# EAGLE board shift-register (EAGLE 7.6.0)
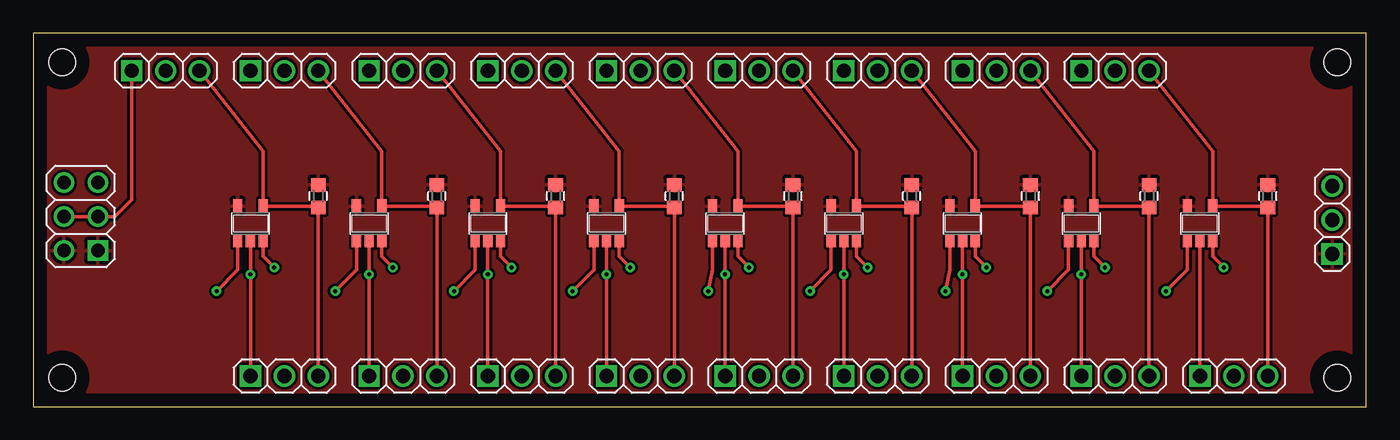
[diagram p0: board, top side]
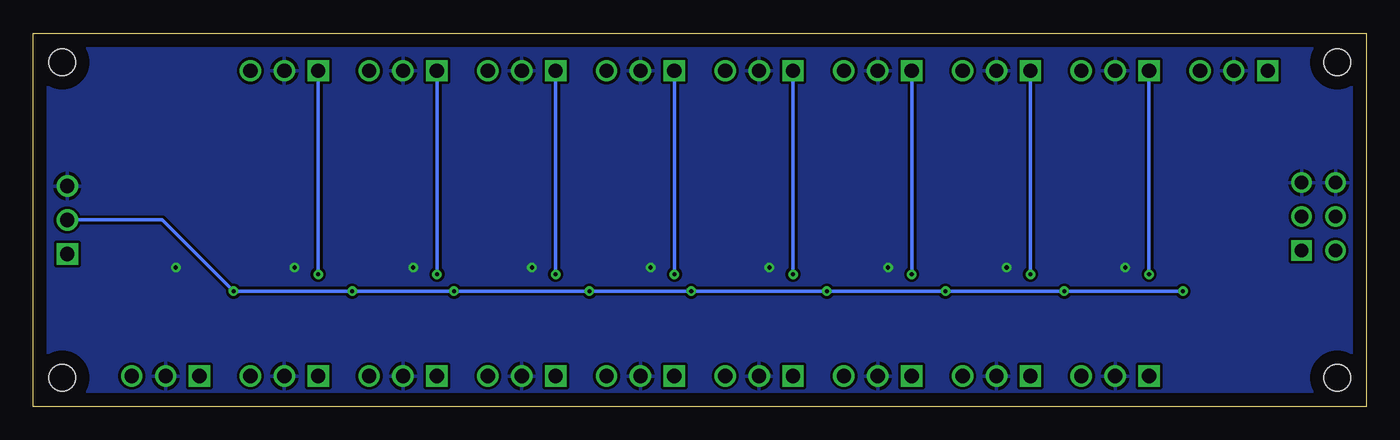
[diagram p1: board, bottom side, seen from below]

Size 99.82 x 27.94 mm. Coordinates in mm from the lower left corner, seen from the top.
Outline: 0,0 99.82,0 99.82,27.94 0,27.94 0,0
Copper layers (1*16): Top 0.035mm / dielectric 1.5mm / Bottom 0.035mm
Design rules "default": minimum track width 10mil, minimum drill 24mil, track to track 8mil, track to pad 8mil, pad to pad 8mil, via to via 8mil, smd to smd 8mil, copper to edge 40mil, drill to drill 8mil, minimum pad ring 10mil, minimum via ring 8mil, stop-mask expansion 4mil, vias tented up to drill 0mil, thermal gap 10mil
Holes 2.01 mm at 2.16,2.16 97.66,2.16 2.16,25.78 97.66,25.78
tRestrict: area 0.2,0.2 to 4.2,4.2; area 95.7,0.2 to 99.7,4.2; area 0.2,23.8 to 4.2,27.8; area 95.7,23.8 to 99.7,27.8
bRestrict: area 0.2,0.2 to 4.2,4.2; area 95.7,0.2 to 99.7,4.2; area 0.2,23.8 to 4.2,27.8; area 95.7,23.8 to 99.7,27.8

## Footprints (pad centres in the part's own frame; a part is rotated, then mirrored left to right if it is on the bottom)
SOT23-5 = smd 0.69 x 0.99: 1 -0.95,-1.29; 2 0,-1.29; 3 0.95,-1.29; 4 0.95,1.3; 5 -0.95,1.3
2X03 = drill 1.016 square: 1 -2.54,-1.27 | drill 1.016: 2 -2.54,1.27; 3 0,-1.27; 4 0,1.27; 5 2.54,-1.27; 6 2.54,1.27
1X03 = drill 1.067 square: 1 -2.54,0 | drill 1.067: 2 0,0; 3 2.54,0
R0603 = smd 1 x 1.1: 1 -0.85,0; 2 0.85,0

## Placement (x,y rotation side)
IC1  74LVC1G125DBV  [SOT23-5]  16.26,13.72 0 top
IC2  74LVC1G125DBV  [SOT23-5]  25.15,13.72 0 top
IC3  74LVC1G125DBV  [SOT23-5]  34.04,13.72 0 top
IC4  74LVC1G125DBV  [SOT23-5]  42.93,13.72 0 top
IC5  74LVC1G125DBV  [SOT23-5]  51.82,13.72 0 top
IC6  74LVC1G125DBV  [SOT23-5]  60.71,13.72 0 top
IC7  74LVC1G125DBV  [SOT23-5]  69.6,13.72 0 top
IC8  74LVC1G125DBV  [SOT23-5]  78.49,13.72 0 top
IC9  74LVC1G125DBV  [SOT23-5]  87.38,13.72 0 top
JP1  [2X03]  3.56,14.22 90 top
JP2  [1X03]  9.91,25.15 0 top
JP3  [1X03]  18.8,2.29 0 top
JP4  [1X03]  18.8,25.15 0 top
JP5  [1X03]  27.69,2.29 0 top
JP6  [1X03]  27.69,25.15 0 top
JP7  [1X03]  36.58,2.29 0 top
JP8  [1X03]  36.58,25.15 0 top
JP9  [1X03]  45.47,2.29 0 top
JP10  [1X03]  45.47,25.15 0 top
JP11  [1X03]  54.36,2.29 0 top
JP12  [1X03]  54.36,25.15 0 top
JP13  [1X03]  63.25,2.29 0 top
JP14  [1X03]  63.25,25.15 0 top
JP15  [1X03]  72.14,2.29 0 top
JP16  [1X03]  72.14,25.15 0 top
JP17  [1X03]  81.03,2.29 0 top
JP18  [1X03]  81.03,25.15 0 top
JP19  [1X03]  89.92,2.29 0 top
JP20  [1X03]  97.28,13.97 90 top
R1  [R0603]  21.34,15.75 90 top
R2  [R0603]  30.23,15.75 90 top
R3  [R0603]  39.12,15.75 90 top
R4  [R0603]  48.01,15.75 90 top
R5  [R0603]  56.9,15.75 90 top
R6  [R0603]  65.79,15.75 90 top
R7  [R0603]  74.68,15.75 90 top
R8  [R0603]  83.57,15.75 90 top
R9  [R0603]  92.46,15.75 90 top

## Library data of the parts
IC1-IC9 = 74xx-little-us
JP1-JP20 = pinhead
R1-R9 = resistor

## Nets
ENABLE: IC1.1 IC2.1 IC3.1 IC4.1 IC5.1 IC6.1 IC7.1 IC8.1 IC9.1 JP20.2
GND: IC1.3 IC2.3 IC3.3 IC4.3 IC5.3 IC6.3 IC7.3 IC8.3 IC9.3 JP1.5 JP1.6 JP2.2 JP3.2 JP4.2 JP5.2 JP6.2 JP7.2 JP8.2 JP9.2 JP10.2 JP11.2 JP12.2 JP13.2 JP14.2 JP15.2 JP16.2 JP17.2 JP18.2 JP19.2 JP20.3
IN0: JP1.3 JP1.4 JP2.1
IN1: IC1.2 JP3.1 JP4.1
IN2: IC2.2 JP5.1 JP6.1
IN3: IC3.2 JP7.1 JP8.1
IN4: IC4.2 JP9.1 JP10.1
IN5: IC5.2 JP11.1 JP12.1
IN6: IC6.2 JP13.1 JP14.1
IN7: IC7.2 JP15.1 JP16.1
IN8: IC8.2 JP17.1 JP18.1
IN9: IC9.2 JP19.1
OUT1: IC1.4 JP2.3 JP3.3 R1.1
OUT2: IC2.4 JP4.3 JP5.3 R2.1
OUT3: IC3.4 JP6.3 JP7.3 R3.1
OUT4: IC4.4 JP8.3 JP9.3 R4.1
OUT5: IC5.4 JP10.3 JP11.3 R5.1
OUT6: IC6.4 JP12.3 JP13.3 R6.1
OUT7: IC7.4 JP14.3 JP15.3 R7.1
OUT8: IC8.4 JP16.3 JP17.3 R8.1
OUT9: IC9.4 JP18.3 JP19.3 R9.1
VCC: IC1.5 IC2.5 IC3.5 IC4.5 IC5.5 IC6.5 IC7.5 IC8.5 IC9.5 JP1.1 JP1.2 JP20.1 R1.2 R2.2 R3.2 R4.2 R5.2 R6.2 R7.2 R8.2 R9.2

## Tracks (layer width: path | path; a pad name or v marks a point on that pad's centre or on a via)
ENABLE  (via drill 0.3)
  Top 0.254: IC1.1 15.31,10.23 v13.72,8.64 | IC2.1 24.2,10.23 v22.61,8.64 | IC3.1 33.09,10.23 v31.5,8.64 | IC4.1 41.98,10.23 v40.39,8.64 | IC5.1 50.87,10.23 v50.55,8.64 | IC6.1 59.76,10.23 v58.17,8.64 | IC7.1 68.65,10.23 v68.33,8.64 | IC8.1 77.54,10.23 v75.95,8.64 | IC9.1 86.43,10.23 v84.84,8.64
  Bottom 0.254: v13.72,8.64 v22.61,8.64 v31.5,8.64 v40.39,8.64 v50.55,8.64 v58.17,8.64 v68.33,8.64 v75.95,8.64 v84.84,8.64 90.17,13.97 JP20.2
GND  (via drill 0.3)
  Top 0.254: IC1.3 17.21,11.24 v18.03,10.41 | IC2.3 26.1,11.24 v26.92,10.41 | IC3.3 34.99,11.24 v35.81,10.41 | IC4.3 43.88,11.24 v44.7,10.41 | IC5.3 52.77,11.24 v53.59,10.41 | IC6.3 61.66,11.24 v62.48,10.41 | IC7.3 70.55,11.24 v71.37,10.41 | IC8.3 79.44,11.24 v80.26,10.41 | IC9.3 88.33,11.24 v89.15,10.41
  pour Bottom: 0,0 99.82,0 99.82,27.94 0,27.94
IN0
  Top 0.254: JP1.4 JP1.3 6.1,14.22 7.37,15.49 JP2.1
IN1  (via drill 0.3)
  Top 0.254: JP3.1 v16.26,9.91 IC1.2
  Bottom 0.254: JP4.1 v16.26,9.91
IN2  (via drill 0.3)
  Top 0.254: JP5.1 v25.15,9.91 IC2.2
  Bottom 0.254: JP6.1 v25.15,9.91
IN3  (via drill 0.3)
  Top 0.254: JP7.1 v34.04,9.91 IC3.2
  Bottom 0.254: JP8.1 v34.04,9.91
IN4  (via drill 0.3)
  Top 0.254: JP9.1 v42.93,9.91 IC4.2
  Bottom 0.254: JP10.1 v42.93,9.91
IN5  (via drill 0.3)
  Top 0.254: JP11.1 v51.82,9.91 IC5.2
  Bottom 0.254: JP12.1 v51.82,9.91
IN6  (via drill 0.3)
  Top 0.254: JP13.1 v60.71,9.91 IC6.2
  Bottom 0.254: JP14.1 v60.71,9.91
IN7  (via drill 0.3)
  Top 0.254: JP15.1 v69.6,9.91 IC7.2
  Bottom 0.254: JP16.1 v69.6,9.91
IN8  (via drill 0.3)
  Top 0.254: JP17.1 v78.49,9.91 IC8.2
  Bottom 0.254: JP18.1 v78.49,9.91
IN9
  Top 0.254: IC9.2 JP19.1
OUT1
  Top 0.254: JP2.3 17.21,19.12 IC1.4 21.22,15.02 R1.1 JP3.3
OUT2
  Top 0.254: JP4.3 26.1,19.12 IC2.4 30.11,15.02 R2.1 JP5.3
OUT3
  Top 0.254: JP6.3 34.99,19.12 IC3.4 39,15.02 R3.1 JP7.3
OUT4
  Top 0.254: JP8.3 43.88,19.12 IC4.4 47.89,15.02 R4.1 JP9.3
OUT5
  Top 0.254: IC5.4 52.77,19.12 JP10.3 | IC5.4 | IC5.4 56.78,15.02 R5.1 JP11.3
OUT6
  Top 0.254: JP13.3 R6.1 65.67,15.02 IC6.4 61.66,19.12 JP12.3
OUT7
  Top 0.254: JP14.3 70.55,19.12 IC7.4 74.56,15.02 R7.1 JP15.3
OUT8
  Top 0.254: JP16.3 79.44,19.12 IC8.4 83.45,15.02 R8.1 JP17.3
OUT9
  Top 0.254: JP18.3 88.33,19.12 IC9.4 92.34,15.02 R9.1 JP19.3
VCC
  pour Top: 0,0 99.82,0 99.82,27.94 0,27.94